# Altium PCB Prototype Board V1.PcbDoc
Units mil, origin at the board's own origin, x right, y up, seen from the top; angles counter-clockwise.
Board outline 2600 x 3000 mil, 2 copper layers (Top Layer, Bottom Layer); 21 components, 14 nets, 57 pads, 0 vias.
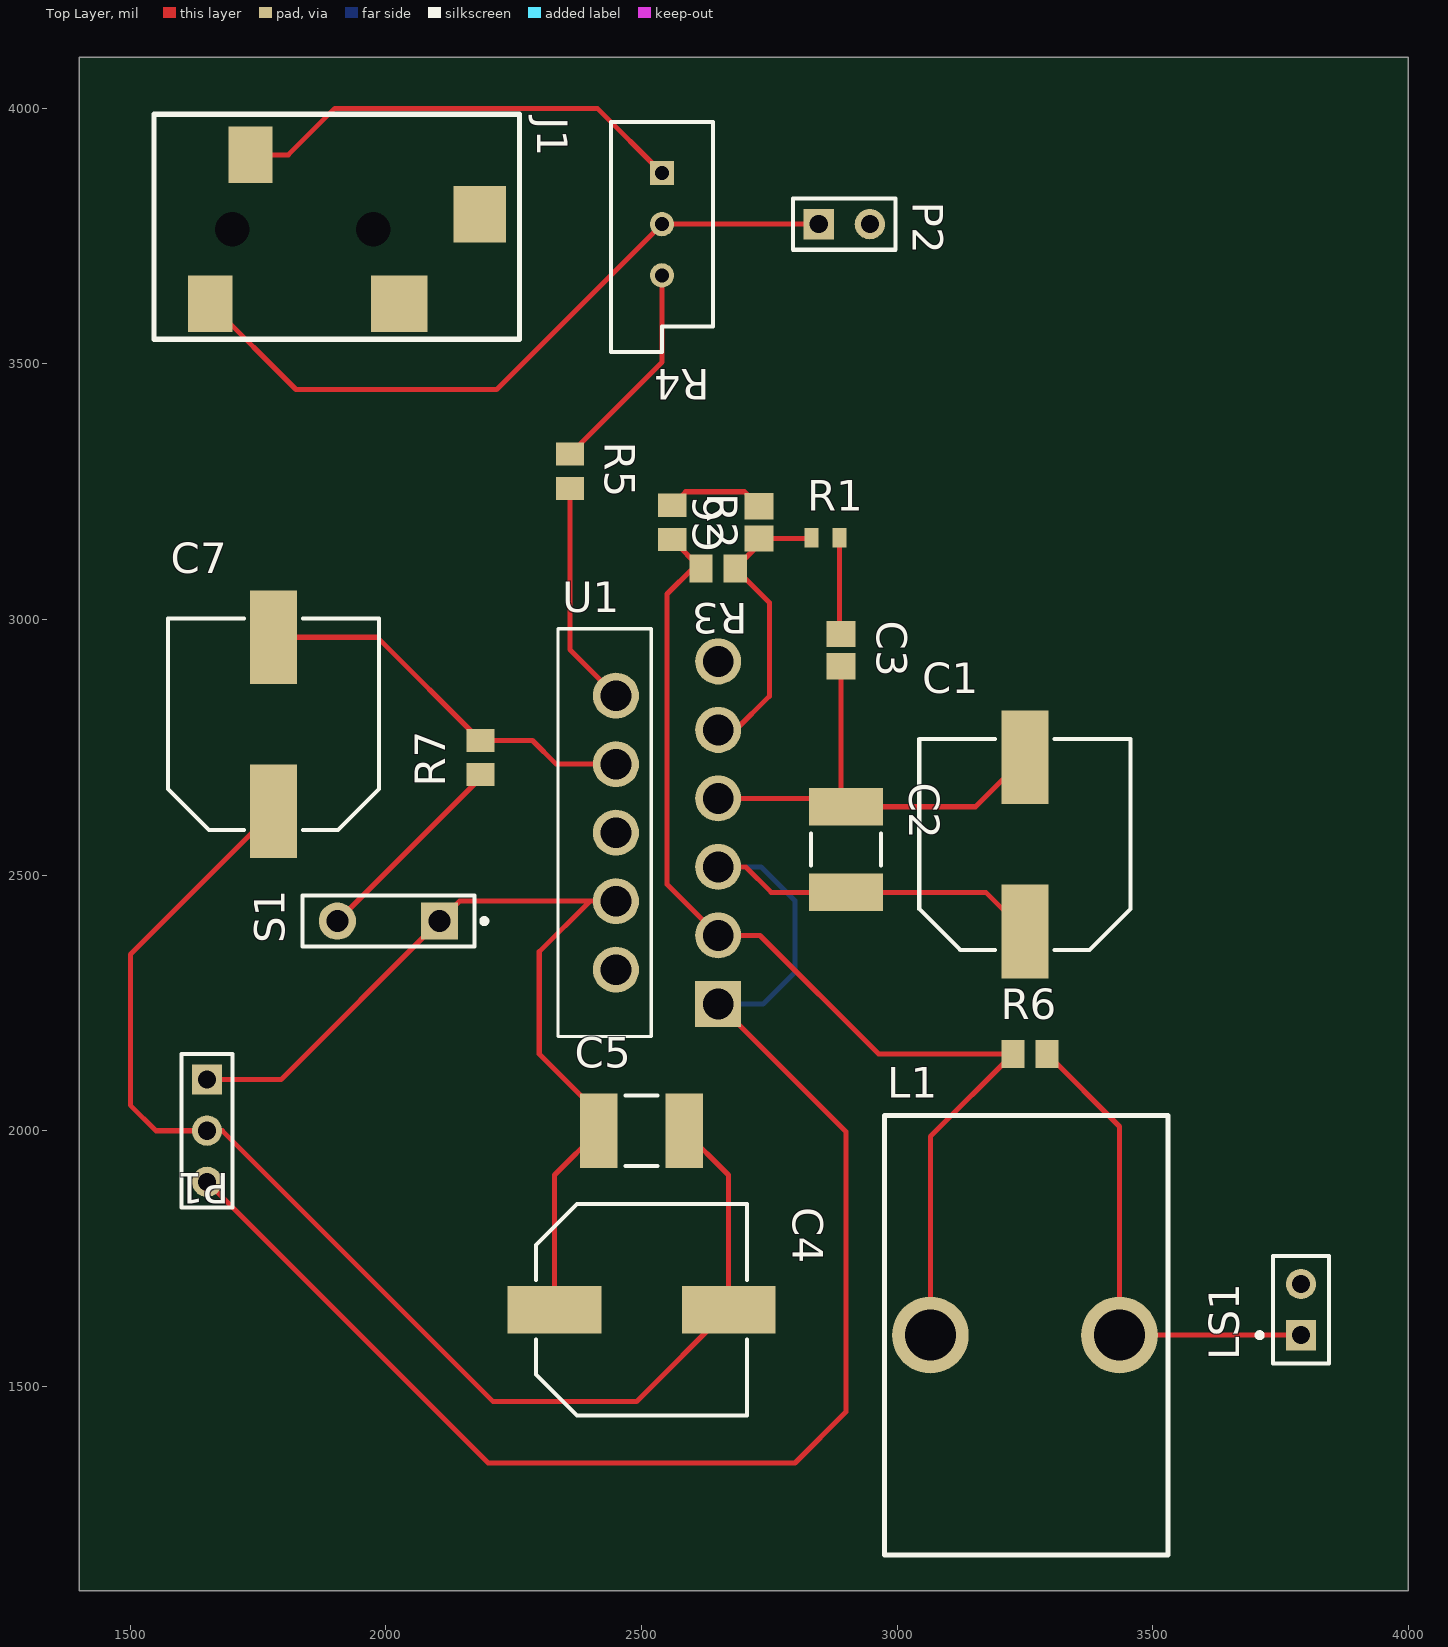
[diagram p0: Top Layer view]
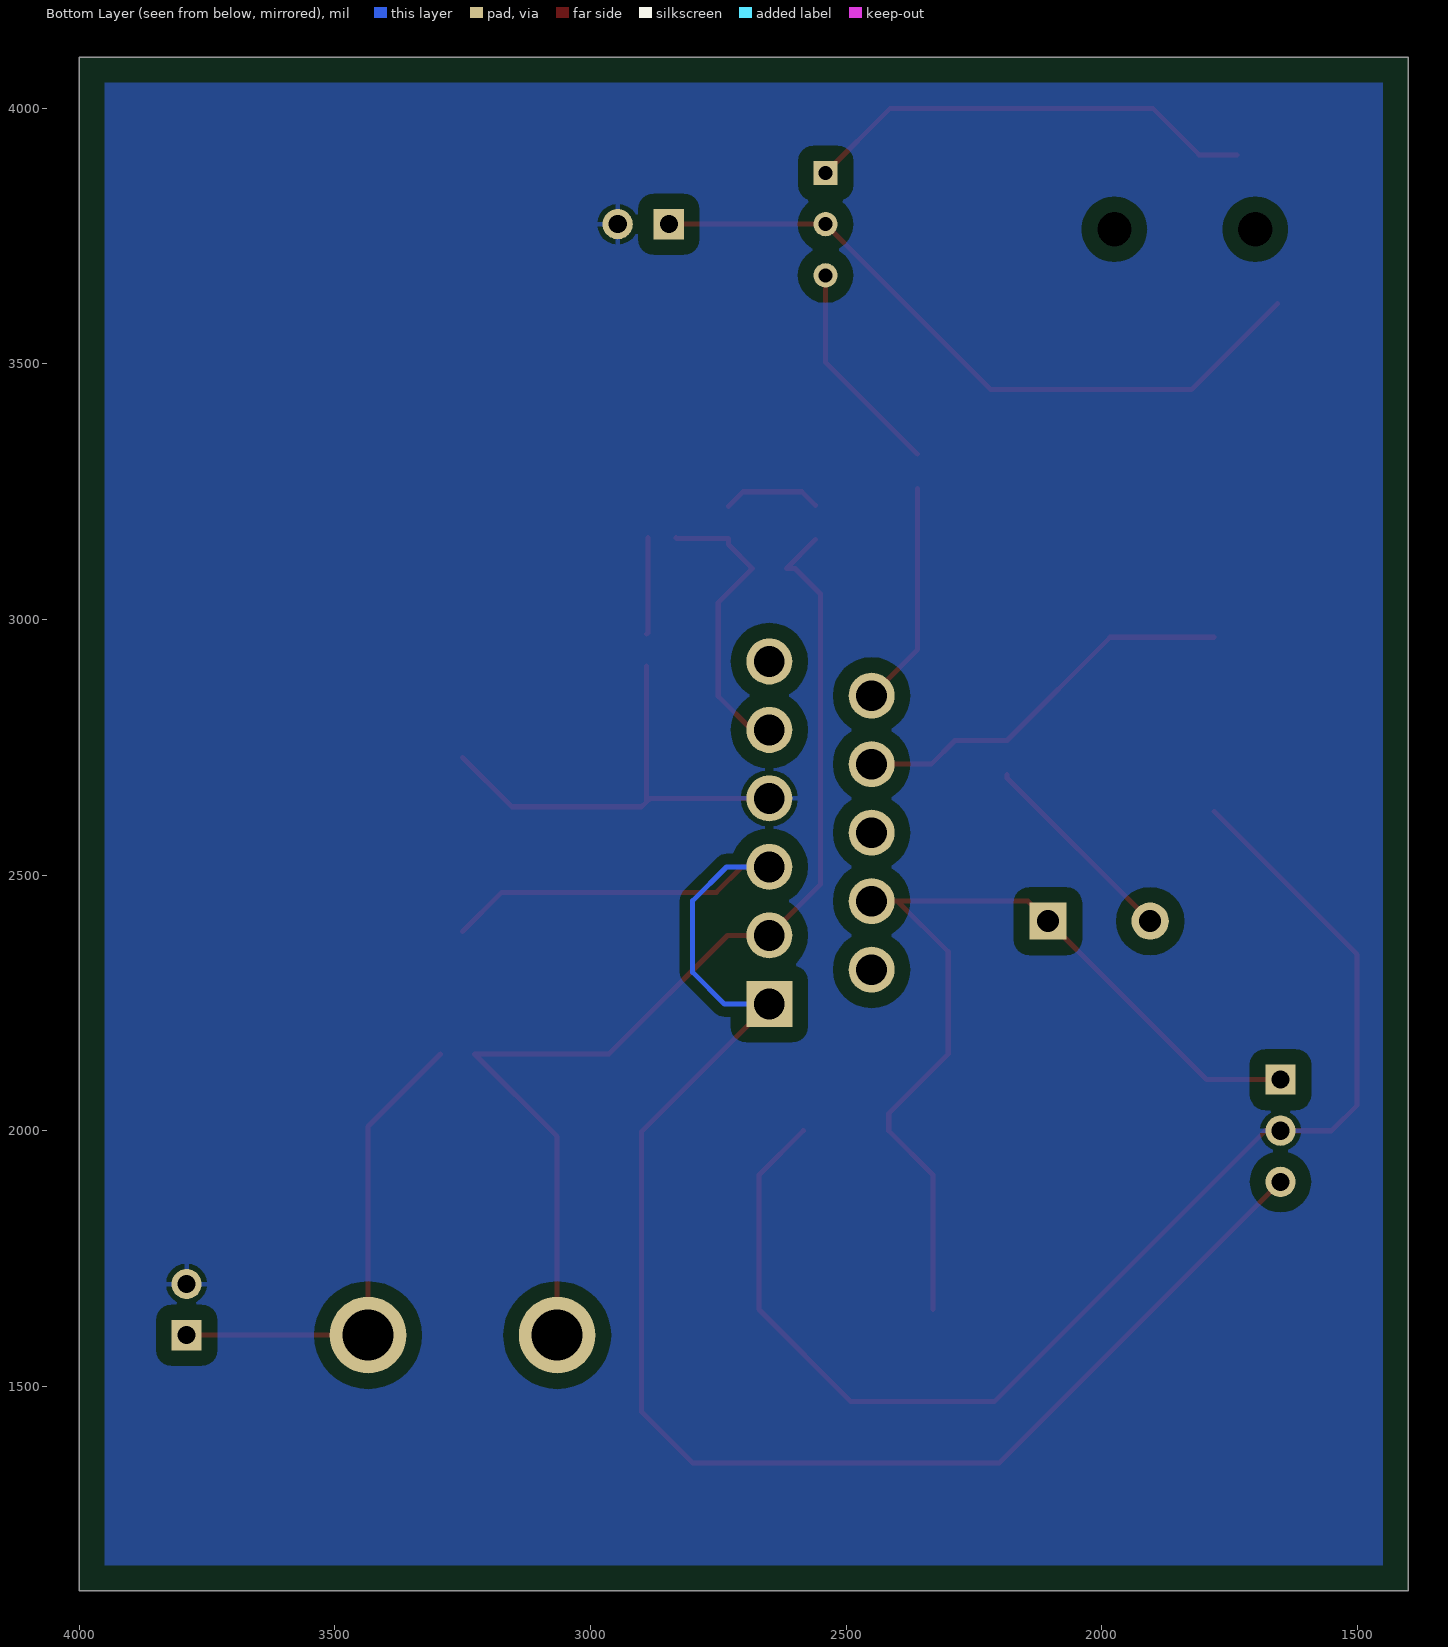
[diagram p1: Bottom Layer view, seen from below]
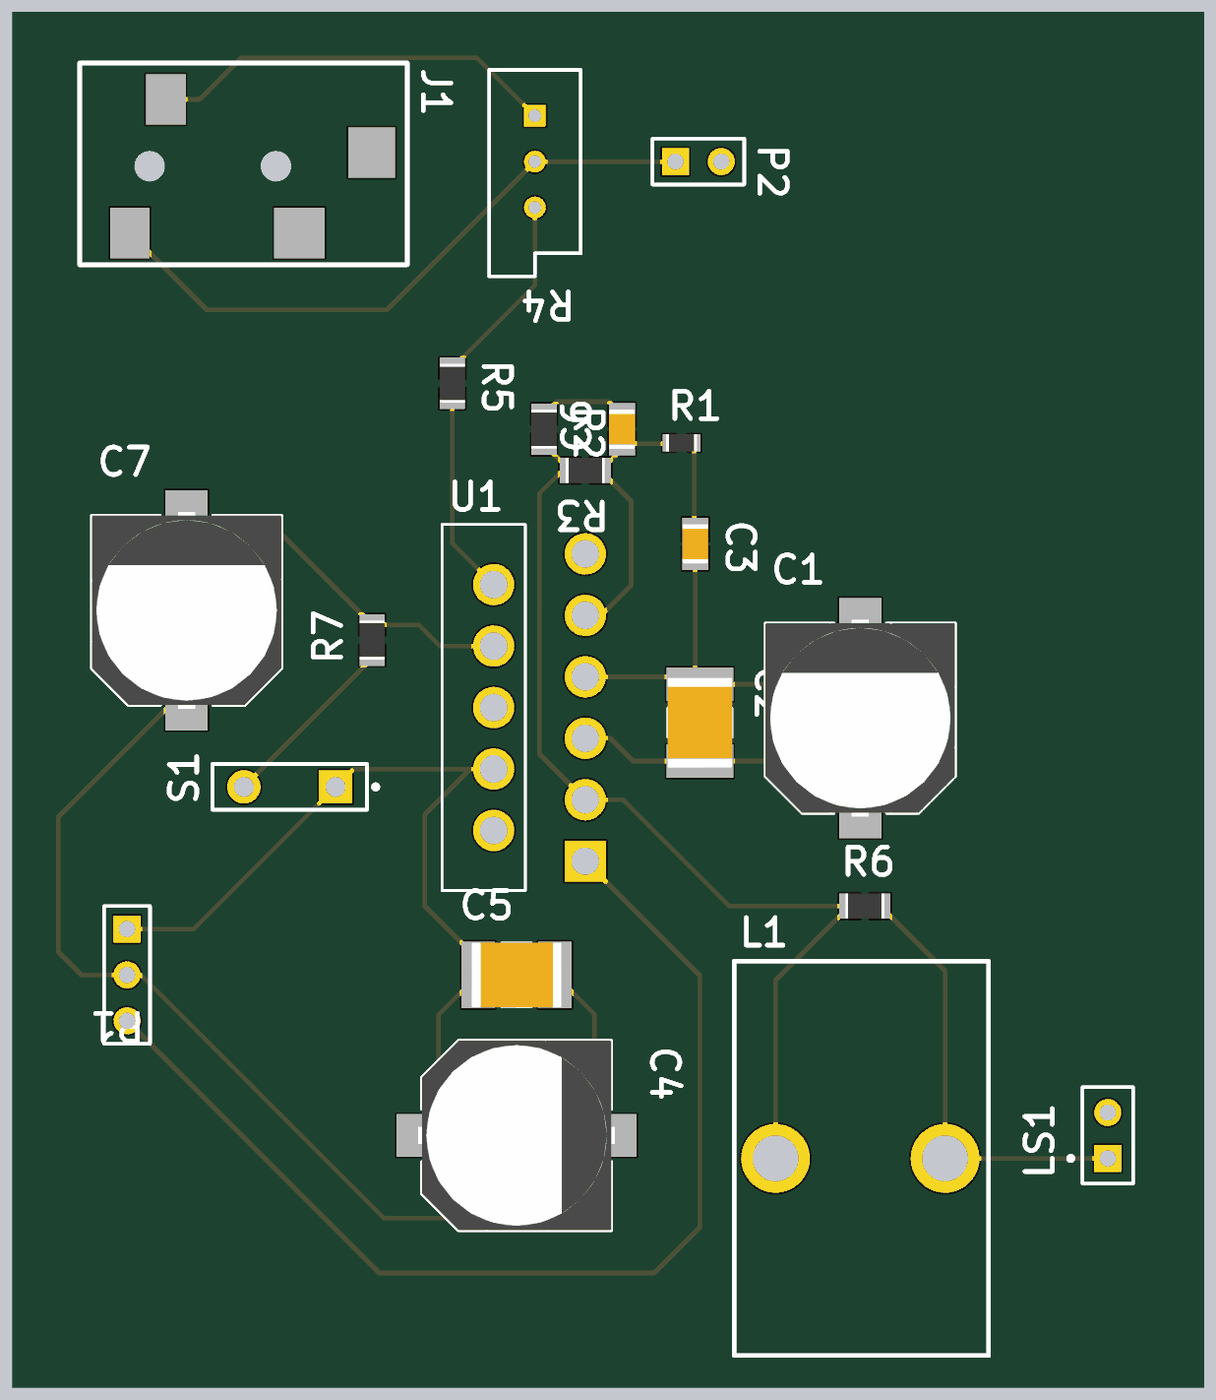
[diagram p2: 3D render of the assembled board from above, using the file's embedded part models]

## Layer stack, top to bottom
Top Solder: solder mask 0.4, Solder Resist, Dk 3.5
Top Layer: signal copper 1.4
Dielectric 1: dielectric 12.6, FR-4, Dk 4.8
Bottom Layer: signal copper 1.4
Bottom Solder: solder mask 0.4, Solder Resist, Dk 3.5

## Board outline
1400,1100 1400,4100 4000,4100 4000,1100

## Design rules (kind name [scope] priority, off if disabled: settings)
Clearance [All] p1: gap=10 ignorepadtopadclearanceinfootprint=FALSE except(0: Arc-Hole Track-Hole SMDPad-Hole THPad-Hole Via-Hole Fill-Hole Poly-Hole Region-Hole Text-Hole; 20: Track-Poly; 30: THPad-Poly)
PlaneClearance [All] p1: clearance=50
PolygonConnect [All] p1: connectstyle=Relief reliefconductorwidth=10 reliefentries=4 polygonreliefangle="90 Angle" airgapwidth=10
RoutingVias [All] p1: holewidth=28 width=50 viastyle="Through Hole" minholewidth=28 minwidth=50 maxholewidth=28 maxwidth=50
SolderMaskExpansion [All] p1: expansion=4
Width [All] p1: maxlimit=10 minlimit=10 preferedwidth=10
29 further rules are at their usual default settings.

## Components (designator, comment, footprint, x,y, rotation, side; value= is the part's Value field where it differs from the comment)
C1 "UUQ1H101MCL1GS" CAPAE109103X103M 3250,2560 r90 top
C2 "ECH-U1H104JX9" CAP1913 2900,2550 r270 top
C3 "C2012C0G1H562J060AA" CAP0805 2890,2940 r270 top
C4 "UUQ1H101MCL1GS" CAPAE109103X103M 2500,1650 r0 top
C5 "ECH-U1H104JX9" CAP1913 2500,2000 r0 top
C6 "C0805C750J5GAC7800" CAP0805 2730,3190 r90 top
C7 "UUQ1H101MCL1GS" CAPAE109103X103M 1780,2795 r90 top
J1 "SJ-3523-SMT-TR" "CONN JACK STEREO 3.5MM SMD R/A" 1561.61,3763.39 r0 top
L1 "2100LL-100-V-RC" "Shielded Toroidal Inductor" 3250,1600 r0 top
LS1 "Speaker" PIN2 3790,1600 r90 top
P1 "Header 3" HDR1X3 1650,2100 r270 top
P2 "Header 2" HDR1X2 2846.61,3773.39 r0 top
R1 "RT0603DRD076K34L" RES0603 2860,3160 r0 top
R2 "RT0805BRE0710KL" RES0805 2560,3190 r270 top
R3 "ERA-6AEB104V" RES0805 2650,3100 r180 top
R4 "RPot" VR5 2540,3773.39 r270 top value=10k
R5 "RT0805FRE071KL" RES0805 2360,3290 r270 top
R6 "RNCP0805FTD10R0" RES0805 3260,2150 r0 top
R7 "RT0805DRD0734K8L" RES0805 2185,2730 r90 top
S1 "SW-SPST" SPST-2 2005,2410 r180 top
U1 "LM3886TF" AMP_LM3886T 2206,2918 r90 top

## Footprints (in the part's own frame and the unit in brackets; to place one, negate y for a bottom-side part, rotate by r counter-clockwise, add the part's x,y. Pads: shape width x height; smd on the part's side, far side on the other; paste and mask are expansions set on the pad)
AMP_LM3886T [mil]
  rect 90x90 hole 60: 1(-670,-444)
  round 90 hole 60: 2(-603,-244) 3(-536,-444) 4(-469,-244) 5(-402,-444) 6(-335,-244) 7(-268,-444) 8(-201,-244) 9(-134,-444) 10(-67,-244) 11(0,-444)
  silkscreen extent -734,-313 64,-131
CAP0805 [mm] "Chip Capacitor, 2-Leads, Body 2.00x1.25mm, IPC Medium Density"
  rect 1.3x1.45 smd: 1(-0.8,0) 2(0.8,0)
  body extent -1.1,-0.72 1.1,0.72, height 1
CAP1913 [mm] "Chip Capacitor, 2-Leads, Body 4.80x3.30mm, IPC Low Density"
  rect 1.85x3.7 smd: 1(-2.125,0) 2(2.125,0)
  silkscreen extent -0.8,-1.75 0.8,1.75, body extent -2.5,-1.8 2.5,1.8, height 2.3
CAPAE109103X103M [mm] "Aluminum Electrolytic Capacitor, Body 10.30x10.30x10.30mm, IPC Low Density"
  rect 4.65x2.35 smd: 1(-4.325,0) 2(4.325,0)
  silkscreen extent -5.25,-5.25 5.25,5.25, body extent -5.45,-5.25 5.45,5.25, height 10.3
"CONN JACK STEREO 3.5MM SMD R/A" [mm]
  rect 2.2x2.8 smd: 1(2.4,-3.7) 3(4.4,3.7)
  rect 2.8x2.8 smd: 2(11.8,-3.7)
  rect 2.6x2.8 smd: 4(15.8,0.75)
  round 0 hole 1.7 unplated: ""(3.5,0) ""(10.5,0)
  silkscreen extent -0.38,-5.46 17.78,5.71
HDR1X2 [mm] "Connector; Header; 2 Position"
  rect 1.5x1.5 hole 0.9: 1(0,0)
  round 1.5 hole 0.9: 2(2.54,0)
  silkscreen extent -1.27,-1.27 3.81,1.27
HDR1X3 [mm] "Connector; Header; 3 Position"
  rect 1.5x1.5 hole 0.9: 1(0,0)
  round 1.5 hole 0.9: 2(2.54,0) 3(5.08,0)
  silkscreen extent -1.27,-1.27 6.35,1.27
PIN2 [mm] "Photosensitive Diode; 2 Leads"
  rect 1.5x1.5 hole 0.9: 1(0,0)
  round 1.5 hole 0.9: 2(2.54,0)
  silkscreen extent -1.4,-1.4 3.94,2.17
RES0603 [mm] "Chip Resistor, 2-Leads, Body 1.60x0.82mm, IPC Medium Density"
  rect 0.7x0.95 smd: 1(-0.7,0) 2(0.7,0)
  body extent -0.85,-0.48 0.85,0.48, height 0.6
RES0805 [mm] "Chip Resistor, 2-Leads, Body 2.00x1.25mm, IPC Medium Density"
  rect 1.15x1.4 smd: 1(-0.85,0) 2(0.85,0)
  body extent -1.07,-0.7 1.07,0.7, height 0.65
"Shielded Toroidal Inductor" [mil] "Vertical, 370 mil lead spacing, 53 mil lead diameter"
  round 150 hole 100: 1(-185,0) 2(185,0)
  silkscreen extent -275,-430 280,430
SPST-2 [mm] "Switch; 2 Leads"
  rect 1.85x1.85 hole 1.1: 1(-2.54,0)
  round 1.85 hole 1.1: 2(2.54,0)
  silkscreen extent -4.89,-1.27 4.28,1.27
VR5 [mm] "Thru-Hole; 3 Leads"
  rect 1.2x1.2 hole 0.7: 1(-2.54,0)
  round 1.2 hole 0.7: 2(0,0) 3(2.54,0)
  silkscreen extent -5.08,-2.54 6.35,2.54

## Part data
C1 C4 C7: "CAP ALUM 100UF 20% 50V SMD", Capacitance=100µF, Supplier Part Number 1=493-3209-1-ND, Tolerance=±20%, Voltage - Rated=50V, Supplier 1=Digi-Key
C2 C5: "CAP FILM 0.1UF 5% 50VDC 1913", Capacitance=0.1µF, Package / Case=1913, Supplier Part Number 1=PCF1561CT-ND, Tolerance=±5%, Voltage Rating - DC=50V, Supplier 1=Digi-Key
C3: "CAP CER 5600PF 50V C0G 0805", Capacitance=5600pF, Package=0805, Supplier Part Number 1=445-7513-1-ND, Temperature Coefficient="C0G, NP0", Voltage - Rated=50V, Features="Low ESL", Supplier 1=Digi-Key
C6: "CAP CER 75PF 50V NP0 0805", Capacitance=75pF, Package=0805, Supplier Part Number 1=399-14632-1-ND, Voltage - Rated=50V, Features="Low ESL", Supplier 1=Digi-Key
J1: "CONN JACK STEREO 3.5MM SMD R/A", Supplier Part Number 1=CP-3523SJCT-ND, Supplier 1=Digi-Key
L1: "FIXED IND 10UH 11.4A 5 MOHM TH", Current Rating=11.4A, DC Resistance (DCR)="5 mOhm Max", Inductance=10µH, Supplier Part Number 1=2100LL-100-V-RC-ND, Tolerance=±15%, Shielding=Shielded, Supplier 1=Digi-Key
LS1: "Loudspeaker", LatestRevisionDate=17-Jul-2002, LatestRevisionNote="Re-released for DXP Platform.", PackageReference=PIN2, Published=24-Mar-1999, Publisher="Altium Limited"
P1: "Header, 3-Pin", LatestRevisionDate=17-Jul-2002, LatestRevisionNote="Re-released for DXP Platform.", Publisher="Altium Limited"
P2: "Header, 2-Pin", LatestRevisionDate=17-Jul-2002, LatestRevisionNote="Re-released for DXP Platform.", Publisher="Altium Limited"
R1: "RES SMD 6.34KOHM 0.5% 1/10W 0603", Package=0603, Resistance=6.34k, Supplier Part Number 1=311-6.34KDCT-ND, Supplier 1=Digi-Key
R2: "RES SMD 10K OHM 0.1% 1/8W 0805", Package=0805, Resistance=10K, Supplier Part Number 1=YAG2327CT-ND, Supplier 1=Digi-Key
R3: "RES SMD 100K OHM 0.1% 1/8W 0805", Package=0805, Resistance=100k, Supplier Part Number 1=P100KDACT-ND, Supplier 1=Digi-Key
R4: "Potentiometer", LatestRevisionDate=17-Jul-2002, LatestRevisionNote="Re-released for DXP Platform.", PackageDescription="Variable Resistor, Thru-Hole; 3 Leads", PackageReference=VR5, Published=8-Jun-2000, Publisher="Altium Limited", Set Position=0.5, Sim Note="Enter the Resistance value and the set point into parameter fields."
R5: "RES SMD 1K OHM 1% 1/8W 0805", Package=0805, Resistance=1k, Supplier Part Number 1=YAG1240CT-ND, Supplier 1=Digi-Key
R6: "RES 10 OHM 1% 1/4W 0805", Package=0805, Resistance=10, Supplier Part Number 1=RNCP0805FTD10R0CT-ND, Tolerance=±1%, Supplier 1=Digi-Key
R7: "RES SMD 34.8K OHM 0.5% 1/8W 0805", Package=0805, Resistance=34.8K, Supplier Part Number 1=311-2737-1-ND, Supplier 1=Digi-Key
S1: "Single-Pole, Single-Throw Switch", LatestRevisionDate=17-Jul-2002, LatestRevisionNote="Re-released for DXP Platform.", PackageDescription="Switch; 2 Leads", PackageReference=SPST-2, Published=24-Mar-1999, Publisher="Altium Limited"
U1: Package="TO-220-11 Texas", Availability=Unavailable, MF=Texas, MP=LM3886TF, Price=None, SnapEDA_Link=https://www.snapeda.com/symbols-footprints/LM3886TF/Texas%20Instruments/view-part/?ref=snap

## Nets (pads, with @x,y where several pads share a name; then routed paths per layer and width w, separated by ;. In a path a pad name is that pad's centre, name@x,y a point inside that pad or via, vN(x,y) a via of type N, cw(c..) or ccw(c..) an arc to the next point about the centre after c; other vN are vias at no path point)
GND: C1.2 C2.1 C3.2 C4.2 C5.2 C7.1 LS1.2 P1.2 P2.2 U1.7 | length 3473.3
  Top Layer w10: C7.1 1500,2344.72 1500,2050 1550,2000 P1.2 1680,2000 2210,1470 2490.28,1470 C4.2 2670.28,1913.39 C5.2 ; U1.7 2883.66,2650 C2.1@2890,2643.66 ; C3.2 C2.1@2890,2643.66 ; C1.2 3153.39,2633.66 C2.1 C2.1@2890,2643.66
NetC3_1: C3.1 R1.2 | length 189.5
  Top Layer w10: R1.2 2887.56,2973.94 C3.1
NetC6_1: C6.1 R1.1 R3.1 U1.9 | length 585.7
  Top Layer w10: U1.9 2684,2784 2750,2850 2750,3033.46 R3.1 2730,3146.54 C6.1 2830.94,3158.5 R1.1
NetC6_2: C6.2 R2.1 | length 192.8
  Top Layer w10: R2.1 2586.54,3250 2701.5,3250 C6.2
NetC7_2: C7.2 R7.2 U1.8 | length 772.8
  Top Layer w10: C7.2 1983.19,2965.28 R7.2 2286.54,2763.46 2333,2717 U1.8
NetJ1_1: J1.1 P2.1 R4.2 | length 1398.7
  Top Layer w10: J1.1 1823.82,3450 2216.61,3450 R4.2 P2.1 P2.1@2850,3770
NetJ1_3: J1.3 R4.1 | length 895.3
  Top Layer w10: J1.3 1809.06,3909.06 1900,4000 2413.39,4000 R4.1
NetL1_1: L1.1 R2.2 R3.2 R6.1 U1.3 | length 2166.2
  Top Layer w10: R2.2 R3.2 2600,3100 2550,3050 2550,2482 U1.3 2732,2382 2964,2150 R6.1 3065,1988.46 L1.1
NetL1_2: L1.2 LS1.1 R6.2 | length 963.6
  Top Layer w10: R6.2 3435,2008.46 L1.2 LS1.1
NetR4_3: R4.3 R5.1 | length 424.5
  Top Layer w10: R5.1 2540,3503.46 R4.3
NetR5_2: R5.2 U1.10 | length 442.8
  Top Layer w10: R5.2 2360,2941 U1.10
NetR7_1: R7.1 S1.2 | length 402.5
  Top Layer w10: S1.2 2185,2690 R7.1
VCC: C1.1 C2.2 P1.3 U1.1 U1.5 | length 3566.1
  Top Layer w10: P1.3 2200,1350 2800,1350 2900,1450 2900,1998 U1.1 ; U1.5 2704,2516 2753.66,2466.34 C2.2 3173.39,2466.34 C1.1
  Bottom Layer w10: U1.1 2738,2248 2800,2310 2800,2450 2734,2516 U1.5
VEE: C4.1 C5.1 P1.1 S1.1 U1.4 | length 1868.6
  Top Layer w10: P1.1 1795,2100 S1.1 2144,2449 2399,2449 ; C4.1 2329.72,1913.39 C5.1 2416.34,2033.66 2300,2150 2300,2350 2399,2449 ; U1.4 2399,2449
pads on no net: J1. J1.2 J1.4 U1.2 U1.6 U1.11

## Polygon pours and split planes (outlines as drawn)
GND on Bottom Layer "GND_PLANE" (solid, remove dead copper, pour order 0): 1450,4050 3950,4050 3950,1150 1450,1150

## Silkscreen, mask and mechanical layers (free items; w line width, h text height)
Mechanical 13:
  lines w10: 1400,1100 1400,4000 1400,4100 4000,4100 4000,1100 1400,1100